# EAGLE board 93.5 (EAGLE 9.5.2)
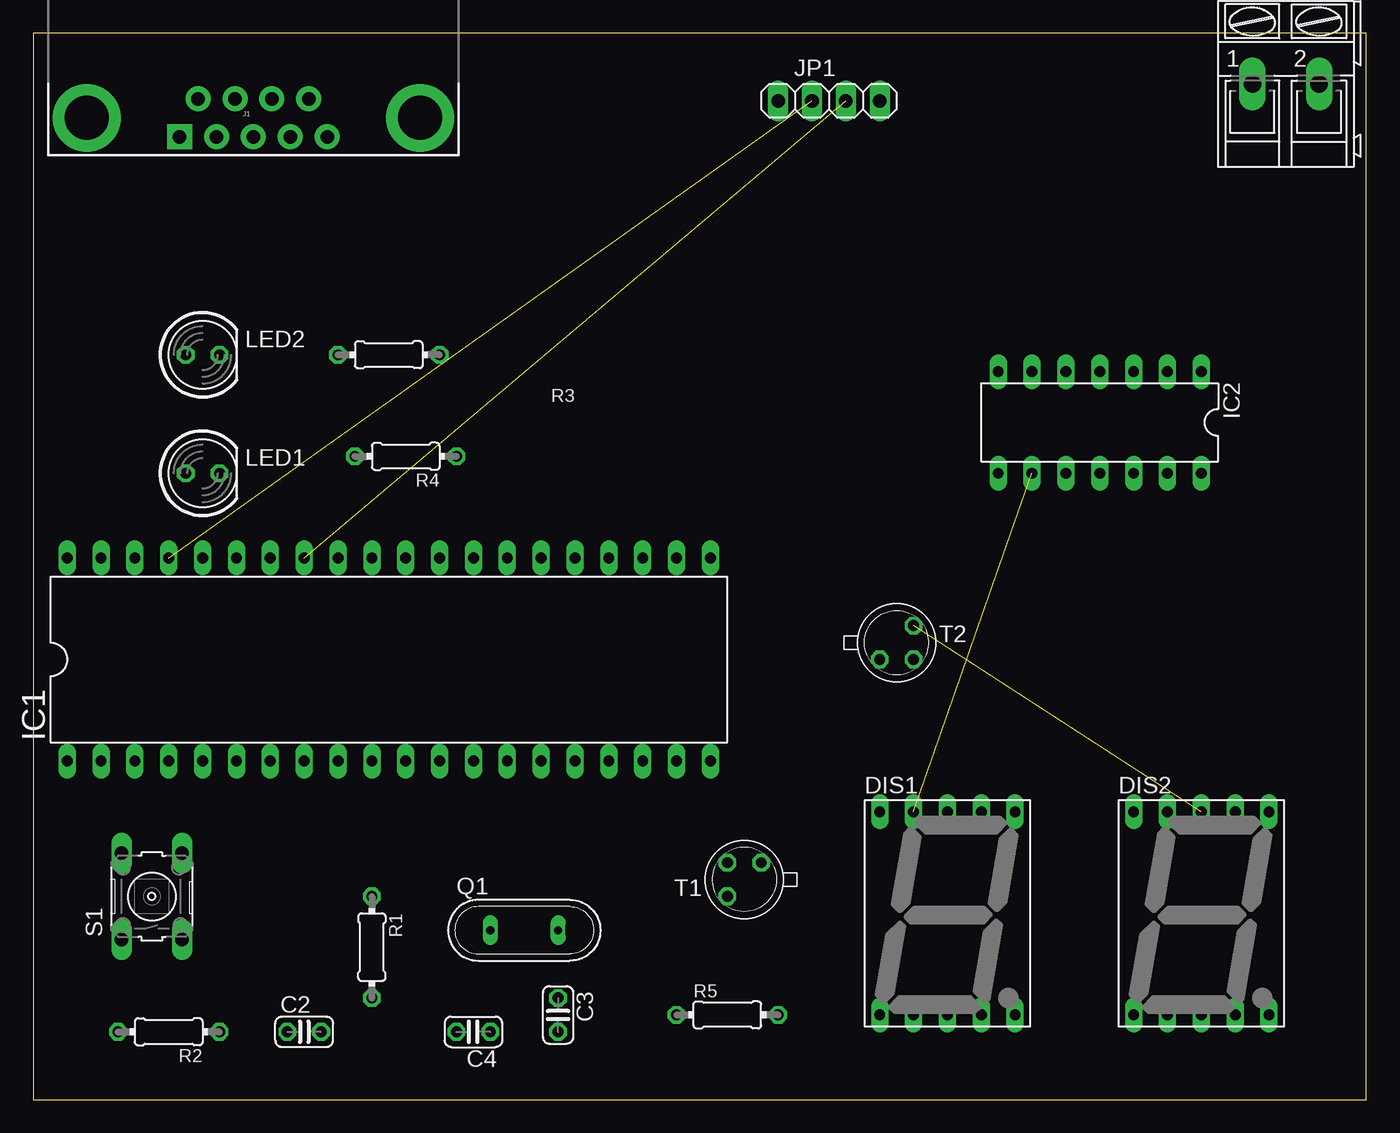
[diagram p0: board, top side]
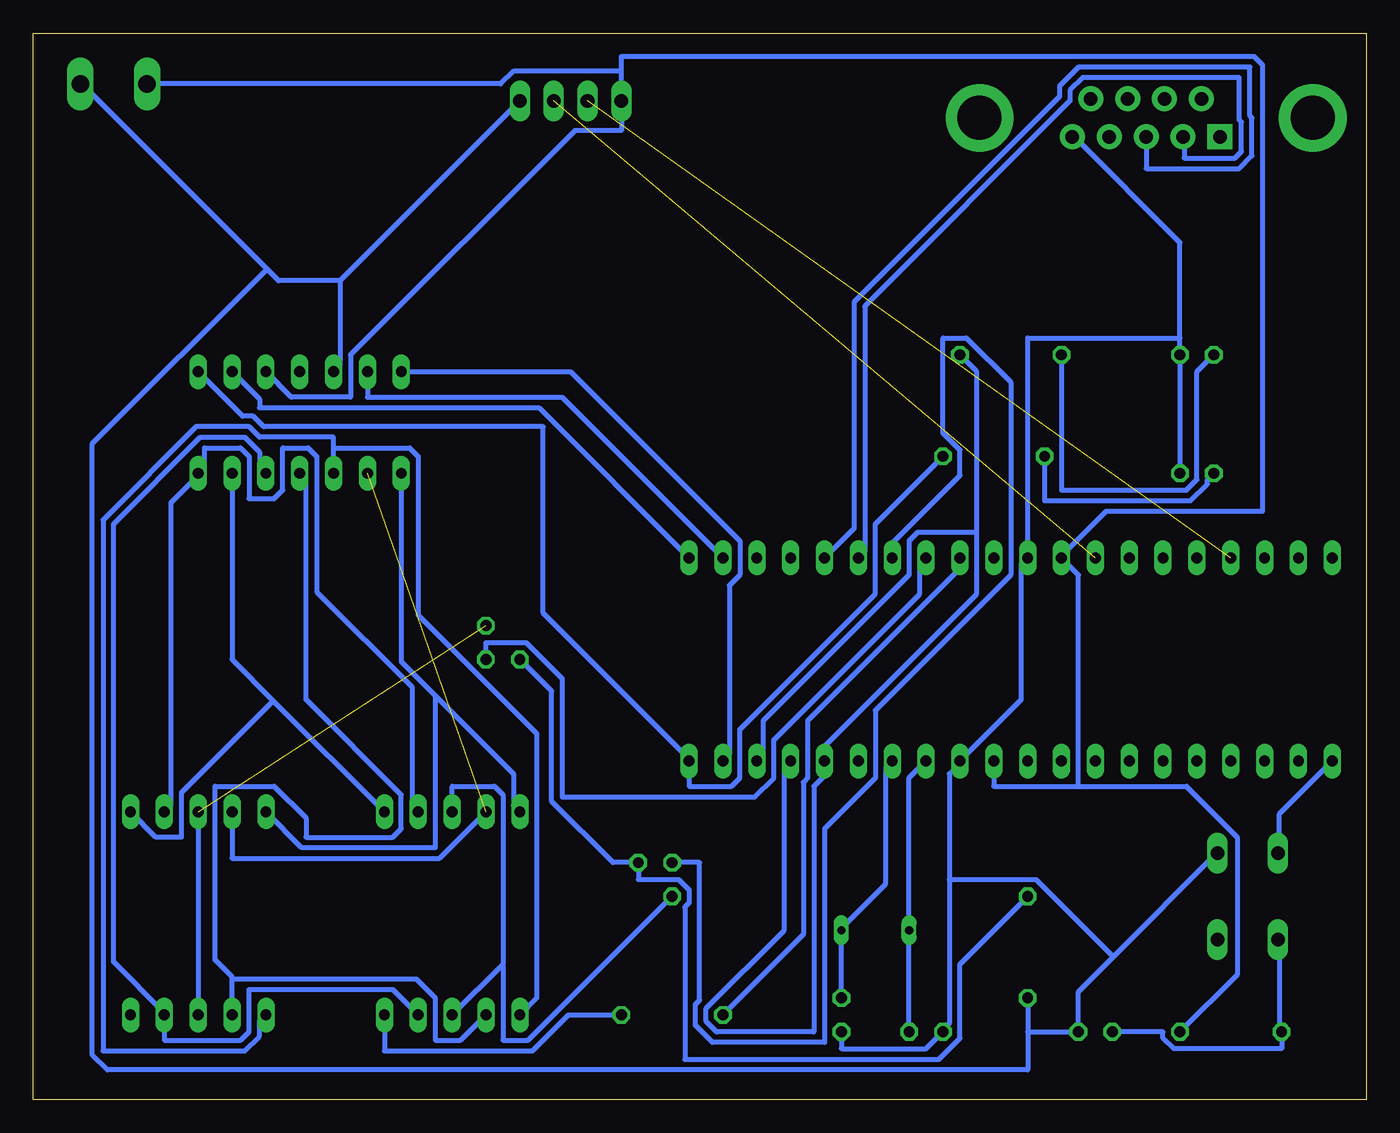
[diagram p1: board, bottom side, seen from below]

Size 100 x 80 mm. Coordinates in mm from the lower left corner, seen from the top.
Outline: 0,0 100,0 100,80 0,80 0,0
Copper layers (1*16): Top 0.035mm / dielectric 1.5mm / Bottom 0.035mm
Design rules "default *": minimum track width 15mil, minimum drill 0.35mm, track to track 15mil, track to pad 15mil, pad to pad 15mil, via to via 15mil, smd to smd 15mil, copper to edge 40mil, drill to drill 6mil, minimum pad ring 10mil, minimum via ring 8mil, stop-mask expansion 4mil, vias tented up to drill 0mil, thermal gap 10mil

## Footprints (pad centres in the part's own frame; a part is rotated, then mirrored left to right if it is on the bottom)
C025-024X044 = drill 0.813 octagon: 1 -1.27,0; 2 1.27,0
HDSP-M = drill 0.813 long: 1 -5.08,-7.62; 2 -2.54,-7.62; 3 0,-7.62; 4 2.54,-7.62; 5 5.08,-7.62; 6 5.08,7.62; 7 2.54,7.62; 8 0,7.62; 9 -2.54,7.62; 10 -5.08,7.62
DIL40 = drill 0.813 long: 1 -24.13,-7.62; 2 -21.59,-7.62; 3 -19.05,-7.62; 4 -16.51,-7.62; 5 -13.97,-7.62; 6 -11.43,-7.62; 7 -8.89,-7.62; 8 -6.35,-7.62; 9 -3.81,-7.62; 10 -1.27,-7.62; 11 1.27,-7.62; 12 3.81,-7.62; 13 6.35,-7.62; 14 8.89,-7.62; 15 11.43,-7.62; 16 13.97,-7.62; 17 16.51,-7.62; 18 19.05,-7.62; 19 21.59,-7.62; 20 24.13,-7.62; 21 24.13,7.62; 22 21.59,7.62; 23 19.05,7.62; 24 16.51,7.62; 25 13.97,7.62; 26 11.43,7.62; 27 8.89,7.62; 28 6.35,7.62; 29 3.81,7.62; 30 1.27,7.62; 31 -1.27,7.62; 32 -3.81,7.62; 33 -6.35,7.62; 34 -8.89,7.62; 35 -11.43,7.62; 36 -13.97,7.62; 37 -16.51,7.62; 38 -19.05,7.62; 39 -21.59,7.62; 40 -24.13,7.62
DIL14 = drill 0.813 long: 1 -7.62,-3.81; 2 -5.08,-3.81; 3 -2.54,-3.81; 4 0,-3.81; 5 2.54,-3.81; 6 5.08,-3.81; 7 7.62,-3.81; 8 7.62,3.81; 9 5.08,3.81; 10 2.54,3.81; 11 0,3.81; 12 -2.54,3.81; 13 -5.08,3.81; 14 -7.62,3.81
DB9 = drill 1.016 pad 1.88 square: 1 -5.54,-1.42 | drill 1.016 pad 1.88: 2 -2.77,-1.42; 3 0,-1.42; 4 2.77,-1.42; 5 5.54,-1.42; 6 -4.15,1.42; 7 -1.38,1.42; 8 1.38,1.42; 9 4.15,1.42 | drill 3.302 pad 5.08: G1 -12.5,0; G2 12.5,0
1X04 = drill 1.016 long: 1 -3.81,0; 2 -1.27,0; 3 1.27,0; 4 3.81,0
LED5MM = drill 0.813 octagon: A -1.27,0; K 1.27,0
QS = drill 0.61 long: 1 -2.54,0; 2 2.54,0
0204/7 = drill 0.813 octagon: 1 -3.81,0; 2 3.81,0
B3F-10XX = drill 1.016 long: 1 -3.251,2.261; 2 3.251,2.261; 3 -3.251,-2.261; 4 3.251,-2.261
TO18 = drill 0.813 octagon: 1 -1.27,-1.27; 2 1.27,-1.27; 3 1.27,1.27
AK300/2 = drill 1.321 long: 1 -2.515,0; 2 2.489,0

## Placement (x,y rotation side)
C2  [C025-024X044]  20.32,5.08 0 top
C3  [C025-024X044]  39.37,6.35 270 top
C4  [C025-024X044]  33.02,5.08 180 top
DIS1  HD-H103  [HDSP-M]  68.58,13.97 0 top
DIS2  HD-H103  [HDSP-M]  87.63,13.97 0 top
IC1  PIC16F877P  [DIL40]  26.67,33.02 0 top
IC2  [DIL14]  80.01,50.8 180 top
J1  DB9FEMALE  [DB9]  16.51,73.66 0 top
JP1  [1X04]  59.69,74.93 0 top
LED1  [LED5MM]  12.7,46.99 0 top
LED2  [LED5MM]  12.7,55.88 0 top
Q1  [QS]  36.83,12.7 0 top
R1  [0204/7]  25.4,11.43 270 top
R2  [0204/7]  10.16,5.08 180 top
R3  [0204/7]  26.67,55.88 180 top
R4  [0204/7]  27.94,48.26 180 top
R5  [0204/7]  52.07,6.35 0 top
S1  [B3F-10XX]  8.89,15.24 90 top
T1  2N706  [TO18]  53.34,16.51 180 top
T2  2N706  [TO18]  64.77,34.29 0 top
X1  [AK300/2]  93.98,76.2 0 top

## Library data of the parts
C2-C4 = rcl; SPICEPREFIX: C
DIS1 DIS2 = display-hp; OC_FARNELL: unknown; OC_NEWARK: unknown
IC1 = microchip; MF: MICROCHIP; MPN: PIC16F877-04/P; OC_FARNELL: 9761349; OC_NEWARK: 61K3463
IC2 = ic-package
J1 = DB9; AVAILABILITY: Unavailable; DESCRIPTION: Tripp Lite DB9 Network In-Line Dataline Surge Protector 120V / 230V 9-PIN DB9; MF: Tripp Lite; MP: DB9; PACKAGE: None; PRICE: None
JP1 = pinhead
LED1 LED2 = led
Q1 = special
R1-R5 = rcl; SPICEPREFIX: R
S1 = switch-omron; MPN: B3F-1000; OC_FARNELL: 176432; OC_NEWARK: 36M3542
T1 T2 = transistor
X1 = con-ptr500; OC_FARNELL: unknown; OC_NEWARK: unknown

## Nets
GND: C2.2 C3.2 C4.2 IC1.12 IC1.31 IC2.5 J1.5 JP1.4 LED1.K LED2.K R1.2 S1.4 X1.2
N$1: IC1.1 S1.2
N$2: C2.1 R2.2 S1.1
N$3: C4.1 IC1.13 Q1.1
N$4: C3.1 IC1.14 Q1.2
N$5: IC1.16 IC1.17 IC1.18 R3.1
N$6: LED2.A R3.2
N$7: IC1.20 IC2.1 R4.1
N$8: LED1.A R4.2
N$9: IC1.26 J1.2
N$10: IC1.25 J1.3
N$11: IC1.19 IC2.7
N$12: DIS1.7 DIS2.7 IC2.14
N$13: DIS1.6 DIS2.6 IC2.13
N$14: DIS1.4 DIS2.4 IC2.12
N$15: DIS1.2 DIS2.2 IC2.11
N$16: DIS1.1 DIS2.1 IC2.10
N$17: DIS1.9 DIS2.9 IC2.9
N$18: DIS1.10 DIS2.10 IC2.8
N$19: DIS1.3 DIS1.8 T1.3
N$20: DIS2.3 DIS2.8 T2.3
N$21: IC1.37 JP1.2
N$22: IC1.33 JP1.3
N$23: IC1.27 T1.2
N$24: IC1.28 T2.2
N$25: IC1.21 IC2.2
N$26: IC1.22 IC2.6
N$27: R1.1 T1.1 T2.1
N$28: IC1.29 R5.1
N$29: DIS1.5 R5.2
VCC: IC1.11 IC1.32 IC2.3 JP1.1 R2.1 X1.1

## Tracks (layer width: path | path; a pad name or v marks a point on that pad's centre or on a via)
GND
  Bottom 0.381: IC2.5 76.99,55.09 76.99,61.44 | JP1.4 76.99,61.44 | 82.47,62.31 81.6,61.44 76.99,61.44 | 82.47,62.31 96.36,76.2 X1.2 | LED1.K LED2.K 13.97,57.15 | 13.97,57.15 13.97,64.29 21.91,72.23 J1.5 | 25.4,5.08 C2.2 21.59,8.1 18.97,10.72 | R1.2 25.4,5.08 | 18.97,10.72 11.27,18.41 S1.4 | C3.2 39.37,3.81 33.02,3.81 C4.2 31.75,5.24 31.27,5.71 31.27,16.51 | 31.27,16.51 31.27,24.45 30.48,25.24 IC1.12 25.88,30 25.88,40.16 IC1.31 25.4,57.15 13.97,57.15 | 18.97,10.72 24.77,16.51 31.27,16.51 | 82.47,62.31 95.57,49.21 95.57,3.33 94.46,2.22 25.4,2.22 25.4,5.08
N$1
  Bottom 0.381: IC1.1 6.51,21.43 6.51,18.57 S1.2
N$2
  Bottom 0.381: S1.1 6.51,11.91 6.51,5.24 R2.2 6.35,3.81 14.45,3.81 15.24,4.6 15.24,5.08 C2.1
N$3
  Bottom 0.381: C4.1 Q1.1 34.29,24.13 IC1.13
N$4
  Bottom 0.381: C3.1 Q1.2 39.37,12.86 36.04,16.19 36.04,24.92 IC1.14
N$5
  Bottom 0.381: R3.1 29.21,54.61 29.21,42.55 | 29.21,42.55 29.21,37.94 40.64,26.51 IC1.16 40.64,24.29 41.43,23.5 41.43,5.08 48.74,5.08 49.53,5.87 49.53,6.83 43.66,12.7 43.66,24.92 IC1.17 | IC1.18 45.24,25.88 45.24,28.42 34.29,39.37 34.29,41.91 33.66,42.55 29.21,42.55
N$6
  Bottom 0.381: LED2.A 12.7,54.61 12.7,46.51 13.49,45.72 22.86,45.72 R3.2
N$7
  Bottom 0.381: R4.1 36.83,43.18 36.83,37.94 46.99,27.78 46.99,24.13 47.62,23.5 50.8,23.5 IC1.20 50.8,25.56 61.75,36.51 61.75,50.48 82.71,50.48 83.5,51.28 84.3,51.28 IC2.1
N$8
  Bottom 0.381: LED1.A 11.91,46.51 11.91,46.2 13.18,44.93 24.13,44.93 R4.2
N$9
  Bottom 0.381: IC1.26 37.62,41.12 37.62,59.53 22.23,74.93 22.23,75.72 21.27,76.68 9.53,76.68 9.53,73.5 9.37,73.34 9.37,71.12 9.84,70.64 13.65,70.64 13.65,72.23 J1.2
N$10
  Bottom 0.381: IC1.25 38.42,42.86 38.42,59.85 23.02,75.25 23.02,76.04 21.59,77.47 8.73,77.47 8.73,73.82 8.57,73.66 8.57,70.8 9.53,69.85 16.51,69.85 J1.3
N$11
  Bottom 0.381: IC1.19 47.78,25.88 47.78,38.58 46.99,39.37 46.99,41.91 59.69,54.61 IC2.7
N$12
  Bottom 0.381: DIS1.7 71.6,22.07 71.6,30.96 78.74,38.1 78.74,48.26 79.38,48.9 81.28,48.9 81.28,45.72 81.92,45.09 83.82,45.09 83.82,48.26 84.45,48.9 87.15,48.9 87.15,47.47 IC2.14 87.63,46.83 89.69,44.77 89.69,22.07 DIS2.7
N$13
  Bottom 0.381: 81.99,29.92 85.09,33.02 IC2.13 | 81.99,29.92 DIS1.6 | DIS2.6 90.81,19.68 88.9,19.68 88.9,23.02 81.99,29.92
N$14
  Bottom 0.381: DIS1.4 73.03,8.26 83.82,8.26 83.82,5.08 84.45,4.45 90.17,4.45 DIS2.4 90.17,6.51 93.98,10.32 93.98,43.18 87.47,49.69 84.14,49.69 83.03,48.58 83.03,47.47 IC2.12
N$15
  Bottom 0.381: DIS1.2 67.94,4.45 69.85,4.45 69.85,7.62 71.28,9.05 85.09,9.05 | DIS2.2 85.09,9.05 | IC2.11 79.53,46.51 79.53,30 72.39,22.86 72.39,20.32 73.03,19.68 79.53,19.68 79.53,21.11 81.92,23.5 86.36,23.5 86.36,10.48 85.09,9.21 85.09,9.05
N$16
  Bottom 0.381: DIS1.1 62.23,7.62 62.23,27.46 71.12,36.35 71.12,48.26 71.75,48.9 77.47,48.9 | IC2.10 77.47,48.9 | DIS2.1 83.03,5.87 83.03,4.76 84.14,3.65 94.77,3.65 94.77,43.5 87.79,50.48 83.82,50.48 83.03,49.69 77.47,49.69 77.47,48.9
N$17  (1 unrouted)
  Bottom 0.381: DIS1.9 69.53,18.1 85.09,18.1 DIS2.9
N$18
  Bottom 0.381: DIS1.10 63.98,22.07 63.98,24.45 69.77,30.24 | 69.77,30.24 72.39,32.86 IC2.8 | DIS2.10 79.85,18.89 69.85,18.89 69.85,30.16 69.77,30.24
N$19
  Bottom 0.381: 64.85,10.08 64.77,10.16 64.77,22.86 65.41,23.5 68.58,23.5 DIS1.8 | 64.85,10.08 DIS1.3 | T1.3 62.87,4.45 64.77,4.45 64.77,10 64.85,10.08
N$20  (1 unrouted)
  Bottom 0.381: DIS2.8 DIS2.3
N$21  (1 unrouted)
N$22  (1 unrouted)
N$23
  Bottom 0.381: T1.2 50.01,17.78 50.01,7.46 50.32,7.14 50.32,5.56 49.05,4.29 40.64,4.29 40.64,20.32 36.83,24.13 36.83,29.21 26.67,39.37 26.67,53.82 30,57.15 31.75,57.15 31.75,50.01 30.48,48.74 30.48,46.83 35.56,41.75 IC1.27
N$24
  Bottom 0.381: IC1.28 33.5,40.16 33.5,37.94 44.45,26.99 44.45,24.13 45.88,22.7 60.33,22.7 60.33,31.59 63.02,34.29 66.04,34.29 T2.2
N$25
  Bottom 0.381: IC1.21 62.07,51.91 83.03,51.91 83.03,52.55 IC2.2
N$26
  Bottom 0.381: IC1.22 60.33,52.7 74.93,52.7 IC2.6
N$27
  Bottom 0.381: R1.1 30.48,10.16 30.48,4.6 32.07,3.02 51.12,3.02 51.12,14.45 50.8,14.76 50.8,15.72 51.59,16.51 54.61,16.51 T1.1 56.52,17.78 61.12,22.38 61.12,30.64 T2.1
N$28
  Bottom 0.381: R5.1 42.23,12.38 42.23,23.81 41.91,24.13 41.91,28.42 30.48,39.85 IC1.29
N$29
  Bottom 0.381: R5.2 59.85,6.35 62.55,3.65 73.66,3.65 DIS1.5
VCC
  Bottom 0.381: R2.1 9.68,9.37 9.68,19.68 13.49,23.5 21.59,23.5 | 21.59,23.5 27.94,23.5 IC1.11 | 21.59,23.5 21.59,39.37 IC1.32 22.86,40.8 19.53,44.13 7.78,44.13 7.78,77.63 8.41,78.26 55.88,78.26 55.88,77.15 | IC2.3 80.64,52.7 76.2,52.7 76.2,55.88 59.37,72.71 55.88,72.71 JP1.1 55.88,77.15 | X1.1 64.93,76.2 63.98,77.15 55.88,77.15